# EAGLE board curveTracerRev4 (EAGLE 9.7.0)
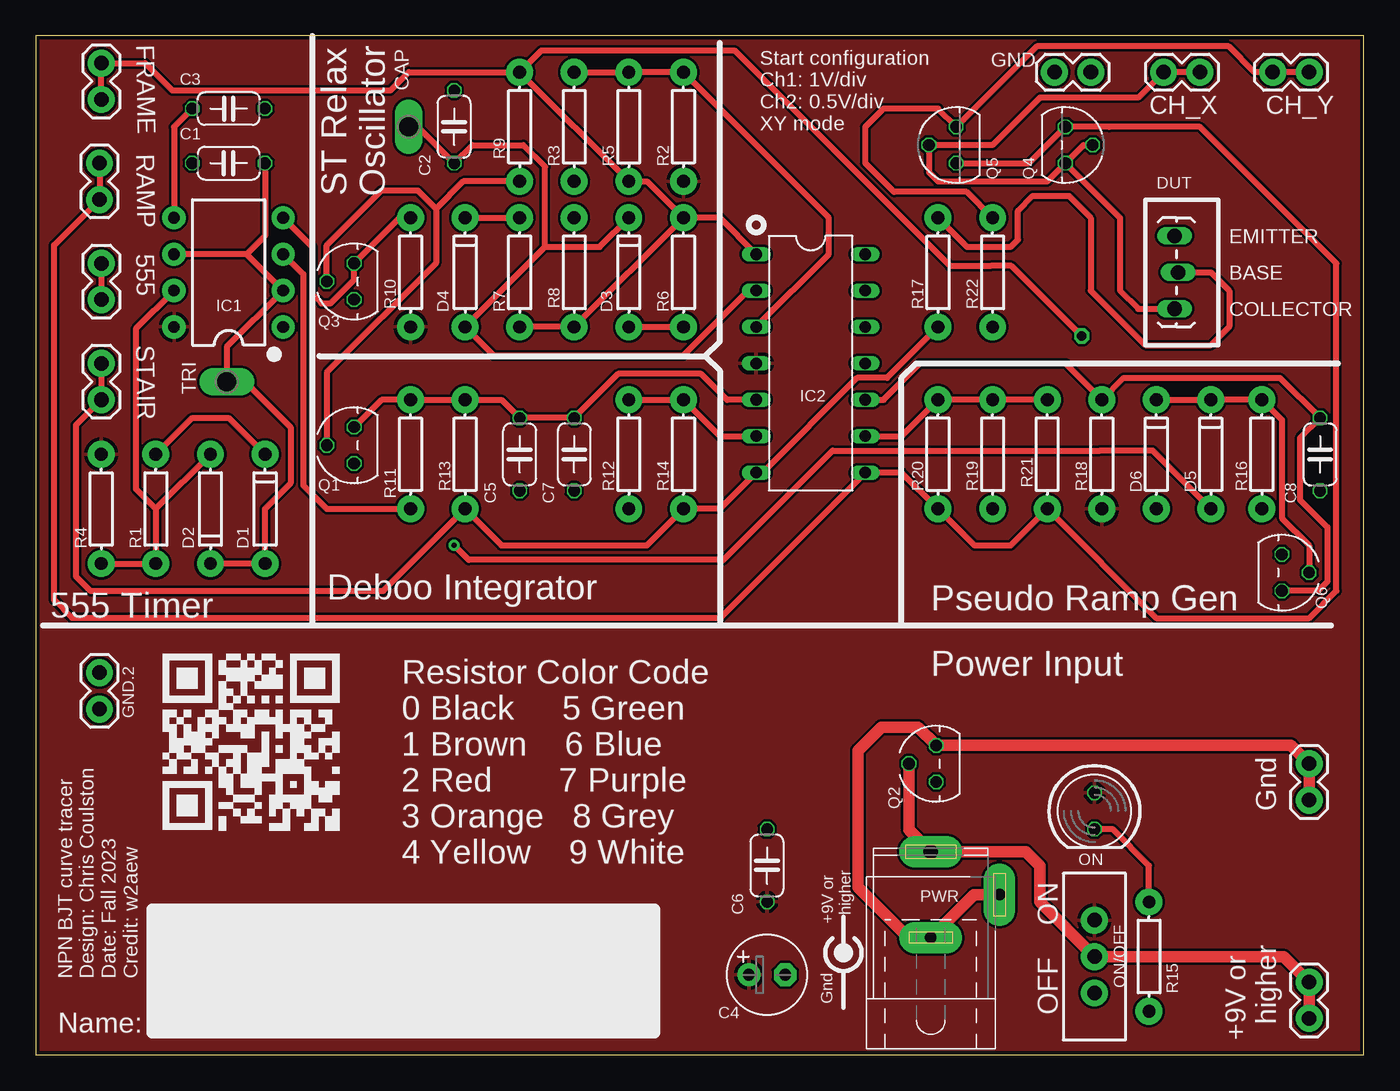
[diagram p0: board, top side]
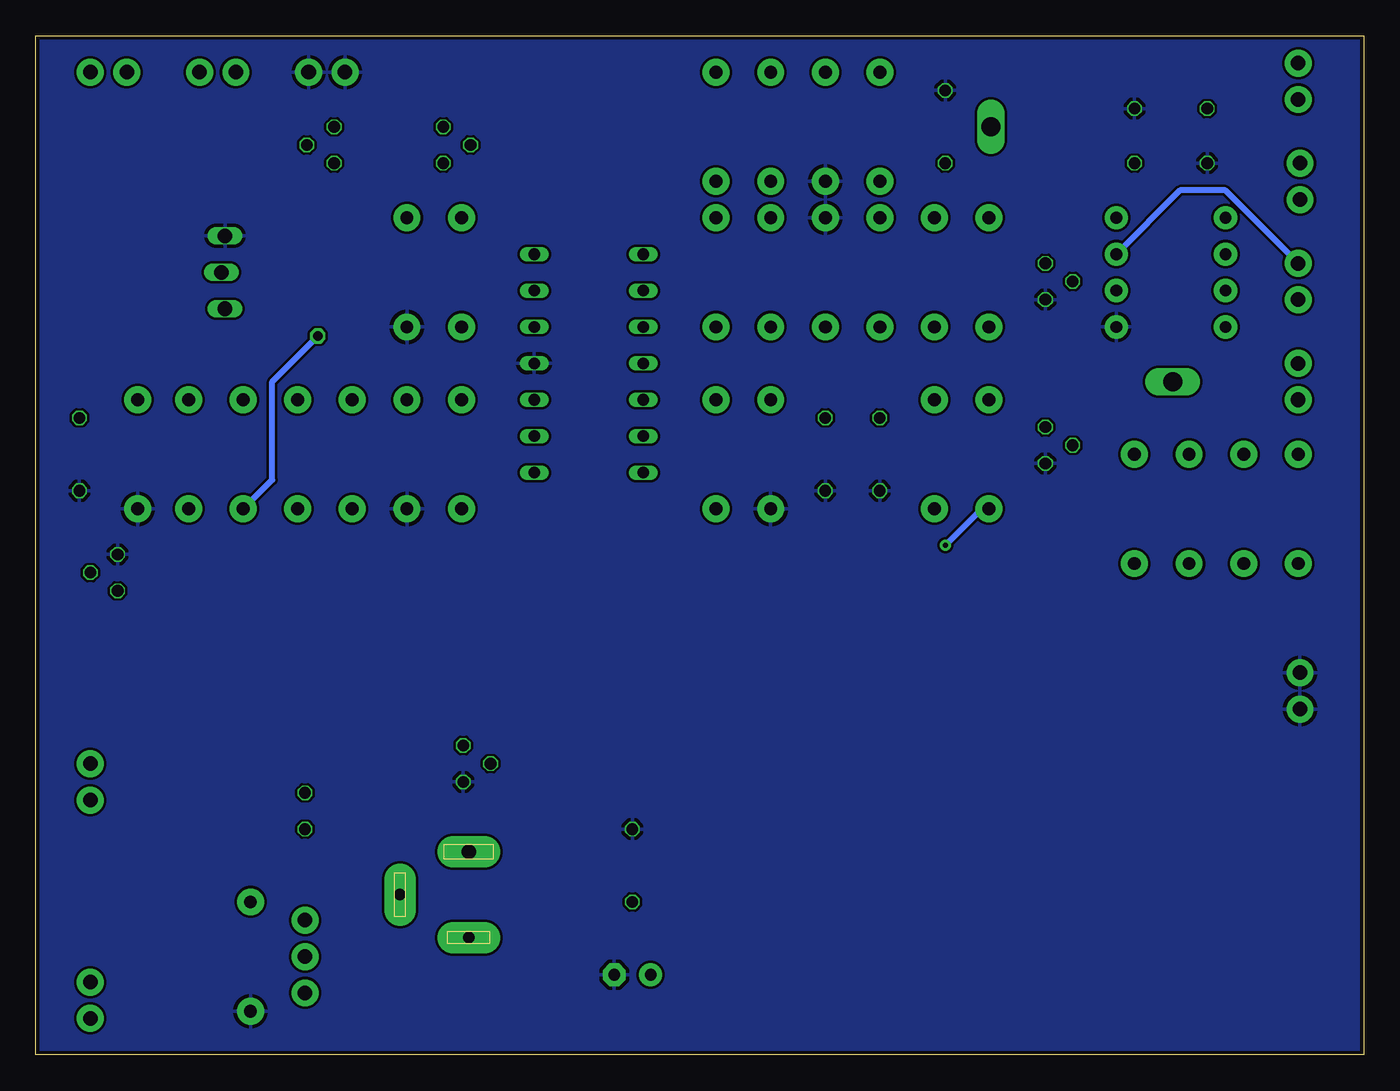
[diagram p1: board, bottom side, seen from below]

Size 92.71 x 71.12 mm. Coordinates in mm from the lower left corner, seen from the top.
Outline: 0,0 92.71,0 92.71,71.12 0,71.12 0,0
Copper layers (1*16): Top 0.0356mm / dielectric 1.5011mm / Bottom 0.0356mm
Design rules "SilverCircuits": minimum track width 7mil, minimum drill 10mil, track to track 7mil, track to pad 7mil, pad to pad 7mil, via to via 7mil, smd to smd 0mil, copper to edge 10mil, drill to drill 10mil, minimum pad ring 4mil, minimum via ring 8mil, stop-mask expansion 4mil, vias tented up to drill 0mil, thermal gap 10mil

## Footprints (pad centres in the part's own frame; a part is rotated, then mirrored left to right if it is on the bottom)
1X02 = drill 1.016 pad 1.88: 1 0,0; 2 2.54,0
C050-024X044 = drill 0.813 octagon: 1 -2.54,0; 2 2.54,0
E2,5-6 = drill 0.813 pad 1.6: + -1.27,0 | drill 0.813 pad 1.6 octagon: - 1.27,0
P1-13Y = drill 1.321 pad 1.905 long: TP 0,0
DIODE-1N4148 = drill 0.9 pad 1.88: A -3.81,0; C 3.81,0
1X03_LOCK_LONGPADS = drill 1.016 long: 1 0,0; 2 2.54,-0.254; 3 5.08,0
DIP08 = drill 0.813 pad 1.626: 1 -3.81,-3.81; 2 -1.27,-3.81; 3 1.27,-3.81; 4 3.81,-3.81; 5 3.81,3.81; 6 1.27,3.81; 7 -1.27,3.81; 8 -3.81,3.81
DIL14 = drill 0.813 long: 1 -7.62,-3.81; 2 -5.08,-3.81; 3 -2.54,-3.81; 4 0,-3.81; 5 2.54,-3.81; 6 5.08,-3.81; 7 7.62,-3.81; 8 7.62,3.81; 9 5.08,3.81; 10 2.54,3.81; 11 0,3.81; 12 -2.54,3.81; 13 -5.08,3.81; 14 -7.62,3.81
LED5MM = drill 0.813 octagon: A -1.27,0; K 1.27,0
SWITCH_SPDT_PTH_11.6X4.0MM = drill 1.016 pad 1.88: 1 0,2.54; 2 0,0; 3 0,-2.54
SPC4077 = drill 0.8 pad 2.184 long: 1 -3,0; 2 0,-4.8 | drill 1 pad 2.184 long: 3 3,0
TO-92 = drill 0.813 octagon: 1 -1.27,0; 2 0,1.905; 3 1.27,0
TO92 = drill 0.813 octagon: 1 1.27,0; 2 0,1.905; 3 -1.27,0
AXIAL-0.3 = drill 0.9 pad 1.88: P$1 -3.81,0; P$2 3.81,0

## Placement (x,y rotation side)
555  [1X02]  4.57,52.7 90 top
C1  0.1u  [C050-024X044]  13.46,62.23 180 top
C2  0.1u  [C050-024X044]  29.21,64.77 90 top
C3  10nF  [C050-024X044]  13.46,66.04 0 top
C4  100uF, 35V  [E2,5-6]  51.05,5.59 0 top
C5  0.1u  [C050-024X044]  33.78,41.91 270 top
C6  10nF  [C050-024X044]  51.05,13.21 90 top
C7  0.1u  [C050-024X044]  37.59,41.91 270 top
C8  0.1u  [C050-024X044]  89.66,41.91 270 top
CAP  TPSPAD1-13Y  [P1-13Y]  26.04,64.77 0 top
CH_X  [1X02]  78.74,68.58 0 top
CH_Y  [1X02]  86.36,68.58 0 top
D1  1N4148  [DIODE-1N4148]  16,38.1 90 top
D2  1N4148  [DIODE-1N4148]  12.19,38.1 270 top
D3  1N4148  [DIODE-1N4148]  41.4,54.61 90 top
D4  1N4148  [DIODE-1N4148]  29.97,54.61 90 top
D5  1N4148  [DIODE-1N4148]  82.04,41.91 90 top
D6  1N4148  [DIODE-1N4148]  78.23,41.91 90 top
DUT  [1X03_LOCK_LONGPADS]  79.5,52.07 90 top
FRAME  [1X02]  4.57,66.67 90 top
GND  [1X02]  71.12,68.58 0 top
GND.2  [1X02]  4.45,26.67 270 top
GNDIN  [1X02]  88.9,17.78 90 top
IC1  555  [DIP08]  13.46,54.61 90 top
IC2  TLC274P  [DIL14]  54.1,48.26 270 top
ON  [LED5MM]  73.91,17.02 270 top
ON/OFF  [SWITCH_SPDT_PTH_11.6X4.0MM]  73.91,6.86 0 top
PWR  [SPC4077]  62.48,11.18 90 top
Q1  2N7000  [TO-92]  22.23,42.55 90 top
Q2  2N7000  [TO-92]  62.87,20.32 90 top
Q3  2N7000  [TO-92]  22.23,53.98 90 top
Q4  2N3906  [TO92]  71.88,63.5 270 top
Q5  2N3906  [TO92]  64.26,63.5 90 top
Q6  2N7000  [TO-92]  87,33.66 270 top
R1  10k  [AXIAL-0.3]  8.38,38.1 270 top
R2  10k  [AXIAL-0.3]  45.21,64.77 270 top
R3  10k  [AXIAL-0.3]  37.59,64.77 90 top
R4  1k  [AXIAL-0.3]  4.57,38.1 90 top
R5  10k  [AXIAL-0.3]  41.4,64.77 90 top
R6  1k  [AXIAL-0.3]  45.21,54.61 270 top
R7  100k  [AXIAL-0.3]  33.78,54.61 90 top
R8  10k  [AXIAL-0.3]  37.59,54.61 90 top
R9  10k  [AXIAL-0.3]  33.78,64.77 90 top
R10  10k  [AXIAL-0.3]  26.16,54.61 90 top
R11  10k  [AXIAL-0.3]  26.16,41.91 270 top
R12  10k  [AXIAL-0.3]  41.4,41.91 270 top
R13  10k  [AXIAL-0.3]  29.97,41.91 90 top
R14  10k  [AXIAL-0.3]  45.21,41.91 90 top
R15  1k  [AXIAL-0.3]  77.72,6.86 90 top
R16  100k  [AXIAL-0.3]  85.6,41.91 270 top
R17  100k  [AXIAL-0.3]  62.99,54.61 270 top
R18  100k  [AXIAL-0.3]  74.42,41.91 90 top
R19  1k  [AXIAL-0.3]  66.8,41.91 270 top
R20  10k  [AXIAL-0.3]  62.99,41.91 90 top
R21  100k  [AXIAL-0.3]  70.61,41.91 90 top
R22  100  [AXIAL-0.3]  66.8,54.61 270 top
RAMP  [1X02]  4.45,62.23 270 top
STAIR  [1X02]  4.57,45.72 90 top
TRI  TPSPAD1-13Y  [P1-13Y]  13.34,46.99 90 top
VIN  [1X02]  88.9,2.54 90 top

## Library data of the parts
555 CH_X CH_Y DUT FRAME GND GND.2 GNDIN RAMP STAIR VIN = SparkFun-Connectors
C1-C8 = rcl; SPICEPREFIX: C
CAP TRI = testpad
D1-D6 = SparkFun-DiscreteSemi; PROD_ID: DIO-08378
IC1 = SparkFun-IC-Special-Function; PROD_ID: IC-09173; PROD_ID_ALT: IC-09173
IC2 = linear
ON = led
ON/OFF = SparkFun-Switches; PROD_ID: SWCH-08261; SF_SKU: COM-00102
PWR = con-jack; OC_FARNELL: unknown; OC_NEWARK: unknown
Q1-Q3 Q6 = transistor-fet
Q4 Q5 = transistor-pnp
R1-R22 = SparkFun-Resistors

## Nets
555PULSE: 555.1 555.2 D5.A IC1.3 R11.P$2
CHX: CH_X.1 CH_X.2 DUT.1 Q4.1 Q4.2 Q5.2
CHY: CH_Y.1 CH_Y.2 Q5.1 R22.P$1
F_TRANS: Q1.2 Q3.2 R9.P$1
FRAME: D6.A FRAME.1 FRAME.2 IC2.1 R5.P$1 R6.P$1 R7.P$1 R8.P$1 R9.P$2
GND: C1.2 C2.2 C3.2 C4.- C5.2 C6.2 C7.2 C8.2 DUT.3 GND.1 GND.2 GND.2.1 GND.2.2 IC1.1 IC2.11 Q1.1 Q2.1 Q3.1 Q6.1 R3.P$1 R8.P$2 R12.P$2 R15.P$1 R16.P$2 R19.P$2 R22.P$2
GND_IN: GNDIN.1 GNDIN.2 PWR.1 PWR.2 Q2.3
N$1: ON/OFF.2 PWR.3 Q2.2 VIN.1 VIN.2
N$2: ON.K R15.P$2
N$3: D1.C R1.P$1
N$5: D2.A IC1.7 R1.P$2 R4.P$1
N$6: D3.A R6.P$2
N$7: C3.1 IC1.5
N$8: C2.1 CAP.TP D3.C D4.A IC2.2
N$9: IC2.3 R2.P$1 R3.P$2 R5.P$2
N$10: D4.C R7.P$2
N$12: D5.C D6.C Q6.2 R16.P$1
N$13: DUT.2 R17.P$1
N$15: IC2.6 R12.P$1 R14.P$2
N$16: IC2.9 R19.P$1 R20.P$2 R21.P$2
N$18: C8.1 IC2.10 Q6.3 R18.P$2
NFRAME: C5.1 C7.1 IC2.5 Q1.3 R11.P$1 R13.P$2
NRST: IC1.4 Q3.3 R10.P$2
STAIR: IC2.7 R13.P$1 R14.P$1 R17.P$2 STAIR.1 STAIR.2
TRIG: C1.1 D1.A D2.C IC1.2 IC1.6 TRI.TP
V_RAMP: IC2.8 Q4.3 Q5.3 R20.P$1 R21.P$1 RAMP.1 RAMP.2
VCC: C4.+ C6.1 IC1.8 IC2.4 ON.A ON/OFF.1 R2.P$2 R4.P$2 R10.P$1 R18.P$1

## Tracks (layer width: path | path; a pad name or v marks a point on that pad's centre or on a via)
555PULSE  (via drill 0.35)
  Top 0.406: v29.21,35.56 30.23,34.54 48.01,34.54 55.63,42.16 74.3,42.16 77.98,42.16 D5.A | 555.2 555.1 | R11.P$2 20.32,38.1 18.67,39.75 18.67,54.48 IC1.3
  Bottom 0.406: v29.21,35.56 26.67,38.1 R11.P$2 | 555.2 9.65,60.33 12.83,60.33 IC1.3
CHX
  Top 0.406: Q4.1 75.69,58.42 75.69,53.34 76.96,52.07 DUT.1 | Q4.1 73.15,63.5 Q4.2 | Q4.1 70.61,60.96 62.99,60.96 62.36,61.59 Q5.2 66.8,63.5 70.1,66.8 76.96,66.8 CH_X.1 CH_X.2
CHY
  Top 0.406: R22.P$1 65,60.22 59.92,60.22 57.91,62.23 57.91,64.77 59.18,66.04 62.99,66.04 Q5.1 69.88,70.38 83.29,70.38 85.09,68.58 CH_Y.1 CH_Y.2
F_TRANS
  Top 0.406: R9.P$1 29.84,60.96 27.94,59.05 | 27.94,59.05 26.67,60.33 24.13,60.33 20.32,56.52 Q3.2 | Q1.2 20.32,47.62 27.94,55.24 27.94,59.05
FRAME  (via drill 0.65)
  Top 0.406: IC2.1 47.75,58.42 R6.P$1 | R6.P$1 42.67,60.96 R5.P$1 R9.P$2 | R7.P$1 R8.P$1 R6.P$1 | FRAME.1 FRAME.2 7.62,69.22 9.53,67.31 24.77,67.31 26.04,68.58 R9.P$2 | R9.P$2 35.31,70.1 48.77,70.1 63.8,55.07 66.67,55.07 68.12,55.07 v73.03,50.16
  Bottom 0.406: D6.A 76.2,40.13 76.2,46.99 v73.03,50.16
GND
  pour Bottom: 0,0 92.71,0 92.71,71.12 0,71.12
GND_IN
  Top 0.813: PWR.2 65.48,11.18 PWR.1 60.91,8.18 57.4,11.68 57.4,21.21 59.05,22.86 61.59,22.86 Q2.3 87.63,21.59 GNDIN.2 GNDIN.1
N$1
  Top 0.813: VIN.1 VIN.2 87.12,6.86 ON/OFF.2 70.1,10.67 70.1,13.21 69.14,14.18 PWR.3 60.96,15.7 Q2.2
N$2
  Top 0.406: R15.P$2 77.72,13.21 75.18,15.75 ON.K
N$3
  Top 0.406: D1.C 13.46,44.45 10.92,44.45 R1.P$1
N$5
  Top 0.406: D2.A 8.38,38.1 | 8.38,38.1 R1.P$2 R4.P$1 | 8.38,38.1 6.99,39.5 6.99,50.67 IC1.7
N$6
  Top 0.406: D3.A R6.P$2
N$7
  Top 0.406: C3.1 9.65,64.77 IC1.5
N$8
  Top 0.406: IC2.2 49.73,53.34 45.21,48.82 31.95,48.82 D4.A 35.56,56.39 | 35.56,56.39 35.56,61.98 34.04,63.5 30.48,63.5 C2.1 26.67,64.77 CAP.TP | 35.56,56.39 39.37,56.39 D3.C
N$9
  Top 0.406: R3.P$2 R5.P$2 R2.P$1 55.37,58.42 55.37,55.88 IC2.3
N$10
  Top 0.406: D4.C R7.P$2
N$12
  Top 0.406: D6.C D5.C R16.P$1 87,44.32 87,37.47 88.9,35.56 Q6.2
N$13
  Top 0.406: DUT.2 82.04,54.61 83.31,53.34 83.31,50.8 82.04,49.53 77.47,49.53 73.66,53.34 73.66,58.42 72.14,59.94 69.6,59.94 68.58,58.93 68.58,56.9 68.07,56.39 65.02,56.39 R17.P$1
N$15
  Top 0.406: IC2.6 47.75,43.18 R14.P$2 R12.P$1
N$16
  Top 0.406: IC2.9 60.45,43.18 62.61,45.34 | 62.61,45.34 R20.P$2 | R20.P$2 R19.P$1 R21.P$2 | R20.P$2 62.61,45.34
N$18
  Top 0.406: IC2.10 59.18,45.72 61.72,48.26 71.88,48.26 R18.P$2 75.95,47.24 86.87,47.24 C8.1 88.27,43.05 88.27,38.73 90.17,36.83 90.17,33.02 89.53,32.38 Q6.3
NFRAME
  Top 0.406: IC2.5 48.26,45.72 46.46,47.52 40.66,47.52 C7.1 C5.1 32.51,45.72 R13.P$2 R11.P$1 24.13,45.72 Q1.3
NRST
  Top 0.406: R10.P$2 25.4,58.42 Q3.3 22.23,54.1 20.57,52.45 19.94,52.45 19.3,53.09 19.3,56.39 | IC1.4 19.11,56.58 | 19.11,56.58 19.3,56.39 | 19.11,56.58 19.3,56.39
STAIR
  Top 0.406: R17.P$2 59.44,47.24 57.34,47.24 50.73,40.64 IC2.7 47.75,38.1 R14.P$1 42.67,35.56 32.51,35.56 R13.P$1 24.26,32.38 3.81,32.38 2.79,33.4 2.79,43.94 STAIR.1 STAIR.2
TRIG
  Top 0.406: 14.73,55.88 IC1.6 | D2.C D1.A 16,38.1 17.78,39.88 17.78,43.81 14.61,46.99 TRI.TP 13.34,49.4 IC1.2 14.73,55.88 | 14.73,55.88 16,57.15 C1.1
V_RAMP
  Top 0.406: Q5.3 69.34,62.23 Q4.3 74.93,64.77 81.28,64.77 90.81,55.24 90.81,32.38 88.9,30.48 78.23,30.48 R21.P$1 68.07,35.56 65.53,35.56 R20.P$1 60.45,40.64 IC2.8 47.75,30.48 2.54,30.48 1.27,31.75 1.27,56.52 RAMP.2 RAMP.1
VCC
  pour Top: 0,0 92.71,0 92.71,71.12 0,71.12

## Text on the board
tPlace: Start configuration / Ch1: 1V/div / Ch2: 0.5V/div / XY mode | ST Relax / Oscillator | EMITTER | BASE | COLLECTOR | Deboo Integrator | Pseudo Ramp Gen | 555 Timer | Power Input | Gnd | Resistor Color Code / 0 Black 5 Green / 1 Brown 6 Blue / 2 Red 7 Purple / 3 Orange 8 Grey / 4 Yellow 9 White | +9V or / higher | NPN BJT curve tracer / Design: Chris Coulston / Date: Fall 2023 / Credit: w2aew | Gnd | OFF ON | Name: | +9V or / higher